# Altium PCB M1-Test-Board.PcbDoc (part 5 of 5)
Units mil, origin at the board's own origin, x right, y up, seen from the top; angles counter-clockwise.
Board outline 3977 x 5000 mil, 4 copper layers (Top, GND Layer 2, Power Layer 3, Bottom), stack 60 mil thick; 191 components, 124 nets, 579 pads, 189 vias.
Unrouted connection lines stored in the file: 80.
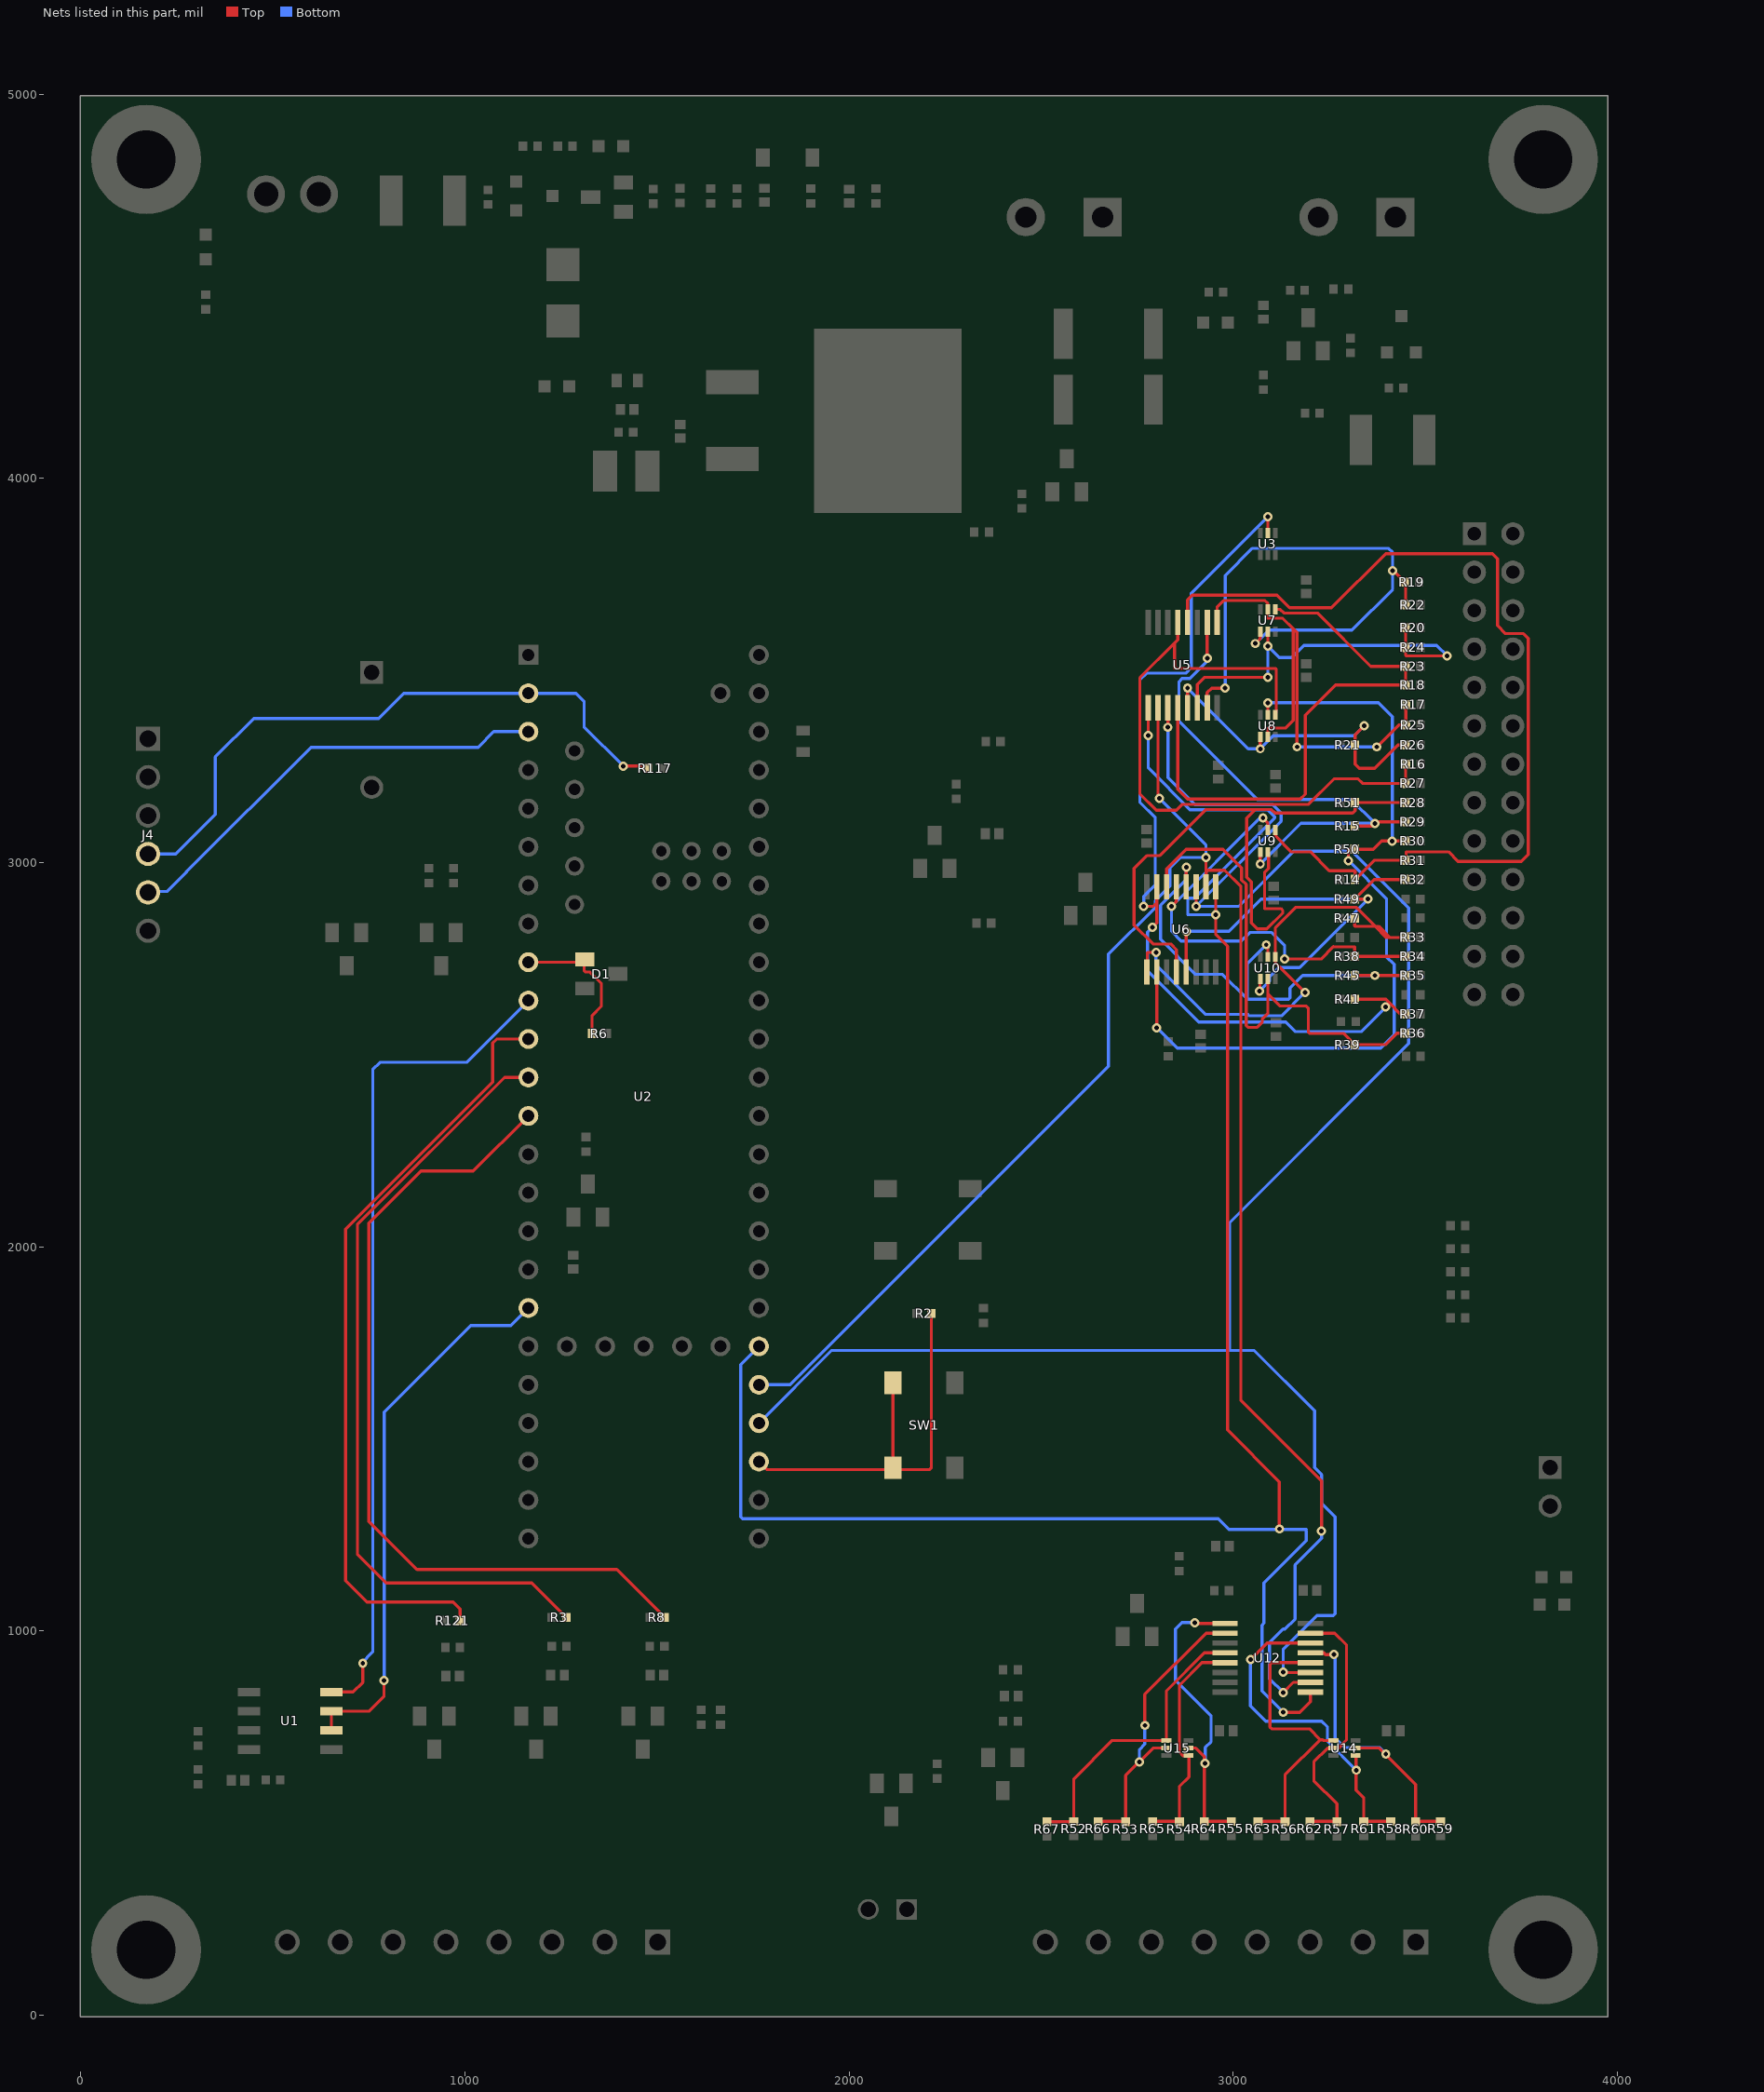
[diagram p5: the nets of this part, all layers, seen from the top]

## Via types
v1: diameter 24, hole 12, Top to Bottom, 186 vias
v2: diameter 50, hole 28, Top to Bottom, 3 vias

## Nets (pads, with @x,y where several pads share a name; then routed paths per layer and width w, separated by ;. In a path a pad name is that pad's centre, name@x,y a point inside that pad or via, vN(x,y) a via of type N, cw(c..) or ccw(c..) an arc to the next point about the centre after c; other vN are vias at no path point) (continued)
NetU2_36: U2.36 U5.11 U6.11 U12.11 | length 5366.6
  Top w8: v1(2830,3352) U5.11@2830,3403 ; v1(2903.39,2886) U6.11@2903.39,2937 ; v1(3130.38,892.95) 3131.72,891.61 U12.11@3201,891.61
  Bottom w8: U2.36@1765.2,1540.63 1954.57,1730 2985.31,1730 ; v1(2830,3352) 2830,3220.93 2900,3150.93 3102.76,3150.93 3125,3128.69 3125,3107.61 v1(2903.39,2886) 3014,2886 3157.64,3029.64 3309.36,3029.64 3457,2882 3457,2529 2990,2062 2990,1734.69 2985.31,1730 ; v1(3130.38,892.95) 3130.38,952.66 3217.72,1040 3260.31,1040 3265,1044.69 3265,1297.16 3230,1332.16 3230,1406.7 3211.7,1425 3211.7,1573.3 3055,1730 2985.31,1730
NetU2_37: U2.37 U5.10 U6.10 U12.10 | length 4949.5
  Top w8: U5.10@2804.41,3403 2804.41,3170.59 v1(2808,3167) ; v1(2928.98,3013) U6.10@2928.98,2937 2929.98,2980 2977.5,2980 3020,2937.5 3020,1600 3230,1390 v1(3230,1260) ; v1(3130.38,839.64) 3156.76,866.02 U12.10@3201,866.02
  Bottom w8: U2.37@1765.2,1640.63 1846.11,1640.63 2675,2469.52 2675,2761.5 2797,2883.5 2797,2900.74 2835,2938.74 2835,2986.07 2861.93,3013 v1(2928.98,3013) 2928.98,3046.02 v1(2808,3167) ; v1(3130.38,839.64) 3094.68,875.33 3094.68,969.68 3130,1005 3135,1005 3160.79,1030.79 3160.79,1171.49 3230,1240.7 v1(3230,1260)
NetU2_38: U2.38 U5.9 U6.9 U12.9 | length 5308.4
  Top w8: v1(2778.82,3331) U5.9@2778.82,3403 ; U6.9@2954.57,2937 v1(2954.57,2864) 2954.57,2812.5 2985.07,2782 2985.07,1522.93 3120,1388 v1@3120,1265 ; v1(3130.38,787.95) 3172.95,787.95 3201,816 U12.9@3201,840.43
  Bottom w8: U2.38@1765.2,1740.63 1717.86,1693.3 1717.86,1296.34 1722.55,1291.66 2961.34,1291.66 2989.08,1263.92 3120.87,1263.92 3190,1263.92 ; v1(2778.82,3331) 2778.82,3246.11 2887.5,3137.43 3089.57,3137.43 3108,3119 3108,3116 2899.5,2907.5 2883,2907.5 2881.89,2906.39 2881.89,2865 2882.89,2864 v1(2954.57,2864) ; v1(3130.38,787.95) 3075,843.33 3075,1015 3080,1020 3080,1080 3080,1125 3190,1235 3190,1260
  other v1: 3120.87,1265.28
P6V-1: R20.2 R24.2 U5.14 U7.5 | length 1054.8
  Top w8: U5.14@2906.77,3403 2906.77,3463.77 2925,3482 v1(3090,3482) ; v1(3090,3563.5) U7.5@3090,3601.06 ; R20.2@3448.91,3611 R24.2@3448.91,3559.79 3448.91,3539 3449.91,3538 v1(3557,3538)
  Bottom w8: v1(3090,3482) v1(3090,3563.5) 3120,3533.5 3152.5,3533.5 3184,3565 3530,3565 v1(3557,3538)
P6V-2: R19.2 R22.1 U5.15 U7.4 | length 1501.3
  Top w8: U5.15@2932.36,3403 2932.36,3442.36 2944,3454 v1(2979,3454) ; v1(3057.81,3570.07) 3070.31,3582.57 U7.4@3070.31,3601.06 ; v1(3415,3760) 3416.69,3760 3445.91,3730.79 R19.2@3445.91,3730 ; R22.1@3448.91,3671 R19.2@3448.91,3727
  Bottom w8: v1(2979,3454) 2979,3747 3050,3818 3404,3818 3415,3807 3415,3711 3309.07,3605.07 3092.81,3605.07 v1(3057.81,3570.07)
P6V-3: R18.2 R23.1 U5.12 U7.1 | length 1509.3
  Top w8: U5.12@2855.59,3403 2855.59,3190.41 2881,3165 3175,3165 3188,3178 3188,3383.5 3266.52,3462.02 R18.2@3448.91,3462.02 R23.1@3448.91,3511 3358,3511 3219.5,3649.5 3131.44,3649.5 3122,3658.94 U7.1@3109.69,3658.94
P12V-1: R17.2 R25.1 U5.1 U7.2 U8.5 | length 1305.6
  Top w8: U5.1@2957.95,3625 2957.95,3664.95 2975,3682 3082.93,3682 3090,3674.93 U7.2@3090,3658.94 3090,3637 3091,3636 3129,3636 3156.18,3608.82 ; U8.5@3090,3327.06 3090,3349 3091,3350 3136,3350 3156.18,3370.18 3156.18,3608.82 ; v1(3166,3301) 3166,3599 3156.18,3608.82 ; v1(3374,3301) 3430.95,3357.95 R25.1@3449.81,3357.95 R17.2@3449.81,3411
  Bottom w8: v1(3166,3301) v1(3374,3301)
P12V-2: R21.2 R26.2 U5.13 U8.4 | length 903.3
  Top w8: U5.13@2881.18,3403 v1(2881.18,3454) ; v1(3070.31,3296.07) U8.4@3070.31,3327.06 ; v1(3341,3356) 3317.09,3332.09 R21.2@3317.09,3306 3317.09,3256.5 3328.59,3245 3368,3245 3429,3306 R26.2@3448.91,3306
  Bottom w8: v1(2881.18,3454) 3039.11,3296.07 v1(3070.31,3296.07) 3104.43,3330.19 3315.19,3330.19 v1(3341,3356)
R_G1: R34.1 R38.1 U6.13 U9.2 | length 1205.9
  Top w8: v1(2839.5,2886) 2852.2,2898.7 U6.13@2852.2,2937 ; v1(3077.5,3115.93) 3090,3103.43 U9.2@3090,3084.94 ; v1(3134,2749) 3229,2749 3261,2781 3316.19,2780 R38.1@3316.19,2756 R34.1@3448.91,2756
  Bottom w8: v1(3077.5,3115.93) 3069.43,3115.93 v1(2839.5,2886) 2839.5,2821 2864.5,2796 3021,2796 3043,2818 3100,2818 3134,2784 v1(3134,2749)
R_G2: R36.1 R39.1 U6.14 U10.5 | length 1329
  Top w8: U6.14@2826.61,2937 2826.61,2984 2877.11,3034.5 2973.5,3034.5 3021.81,2986.19 3021.81,2954.78 3033.5,2943.09 3033.5,2575.73 3038.19,2571.05 3062.5,2571.05 3075.55,2584.1 3075.55,2592.55 3090,2607 3090,2658.5 ; U10.5@3090,2696.85 3090,2658.5 ; R36.1@3448.91,2556 3426,2556 3396,2526 R39.1@3317.09,2526 3288.09,2555 3200.09,2555 3195.41,2559.69 3195.41,2621.59 3190.53,2626.47 3122.03,2626.47 3090,2658.5
R_G3: R32.2 R49.2 U6.5 U10.4 | length 1222.2
  Top w8: U6.5@2877.79,2715 v1(2877.79,2821) ; v1(3068.5,2665.86) 3069.41,2666.77 3069.41,2695.95 U10.4@3070.31,2696.85 ; v1(3351,2904.98) R49.2@3316.19,2904.98 3367.21,2956 R32.2@3448.91,2956
  Bottom w8: v1(2877.79,2821) 2989,2821 3072.98,2904.98 v1(3351,2904.98) 3172.75,2726.73 3118.69,2726.73 3095.12,2703.17 3095.12,2692.48 v1(3068.5,2665.86)
R_G4: R33.2 R47.2 U6.1 U10.1 | length 1294.3
  Top w8: U6.1@2775.43,2715 2776.43,2766 v1(2799,2766) ; v1(3187,2662) 3109.68,2739.32 U10.1@3109.69,2754.73 3109.68,2830.3 3163.05,2883.67 3301.23,2883.67 3319.9,2883.67 3369.57,2834 ; R47.2@3316.19,2855 3316.19,2835 3317.19,2834 3369.57,2834 ; R33.2@3448.91,2806 3448.91,2804.69 3408,2804.69 ; 3369.57,2834 3398.88,2804.69 3408,2804.69 ; 3369.57,2834 3378.69,2834 3408,2804.69
  Bottom w8: v1(2799,2766) 2799,2733.5 2927.5,2605 3037.59,2605 3041.59,2601 3126,2601 v1(3187,2662)
R_G5: R35.2 R45.2 U6.12 U10.2 | length 1256.1
  Top w8: U6.12@2877.79,2937 v1(2877.79,2988) ; v1(3086,2786) 3090,2782 U10.2@3090,2754.73 ; R45.2@3317.09,2706 v1(3369,2706) R35.2@3448.91,2706
  Bottom w8: v1(2877.79,2988) 2877.79,2955.29 2811,2888.5 2811,2800 2902,2709 2972,2709 3036,2645 ; v1(3086,2786) 3036,2736 3036,2645 ; v1(3369,2706) 3180.99,2706 3147.84,2672.85 3147.84,2647.84 3144,2644 3037,2644 3036,2645
R_G6: R37.2 R41.2 U3.2 U6.15 | length 2422.9
  Top w8: v1(2767,2886) 2792.02,2886 2801.02,2895 ; v1(2789.5,2831) 2801.02,2842.52 2801.02,2895 ; U6.15@2801.02,2937 2801.02,2895 ; U3.2@3090,3857.87 v1(3090,3900) ; R41.2@3317.09,2644.19 3397.22,2644.19 3407.2,2634.2 ; v1(3397,2624) 3407.2,2634.2 ; R37.2@3448.91,2606 3435.41,2606 3407.2,2634.2
  Bottom w8: v1(2767,2886) 2767,2912 2797,2942 2797,3117 2757,3157 2757,3475 2775,3493 2876,3493 2891,3508 2891,3701 v1(3090,3900) ; v1(2789.5,2831) 2777,2818.5 2777,2718 2910,2585 3137,2585 3162,2560 3333,2560 v1(3397,2624)
R_nRst: R15.2 R29.1 U5.2 U9.4 | length 1429.5
  Top w8: v1(2932.36,3532) U5.2@2932.36,3625 ; v1(3070.31,2996.07) U9.4@3070.31,3027.06 ; R15.2@3317.09,3095 3362,3095 v1(3369,3102) 3373,3106 R29.1@3448.91,3106
  Bottom w8: v1(2932.36,3532) 2932.36,3523.86 2887.5,3479 2867,3479 2859,3471 2859,3368 3062.57,3164.43 3306.57,3164.43 v1(3369,3102) 3176.24,3102 v1(3070.31,2996.07)
R_S0: R30.2 R50.2 U6.2 U8.2 | length 2182.6
  Top w8: v1(2801,2570) U6.2@2801.02,2715 ; U8.2@3090,3384.94 v1(3090,3416) ; v1(3300,3005) 3300,3033.79 3301,3034.79 R50.2@3316.19,3034.79 3364.79,3034.79 3386,3056 v1(3414,3056) R30.2@3448.91,3056
  Bottom w8: v1(2801,2570) 2854,2517 3384,2517 3419,2552 3419,2735 3399,2755 3399,2906 v1(3300,3005) ; v1(3090,3416) 3378,3416 3414,3380 v1(3414,3056)
R_S1: R16.2 R27.1 U5.5 U8.1 | length 1736.7
  Top w8: U5.5@2855.59,3625 2855.59,3579.59 2847,3571 ; U8.1@3109.69,3384.94 3109.68,3388 3112,3390.32 3112,3504 3111,3505 2848,3505 2847,3506 2847,3571 ; R16.2@3449.81,3256 3448.91,3255.09 R27.1@3448.91,3206 3337,3206 3325,3218 3263,3218 3196.5,3151.5 2867.5,3151.5 2852,3136 2800,3136 2757,3179 2757,3481 2847,3571
R_S2: R28.2 R51.2 U6.4 U9.5 | length 1764.5
  Top w8: U6.4@2852.2,2715 2852.2,2773.3 2837.5,2788 2791.04,2788 2742.02,2837.02 2742.02,2985.02 2775,3018 2808,3018 2928,3138 3057.36,3138 ; U9.5@3090,3027.06 3090,3020 3092,3020 3092,2984.5 3081.5,2974 3081.5,2881 3082.5,2880 3124.29,2880 3128.98,2875.31 3128.98,2868.69 3087.29,2827 3062.5,2827 3047,2842.5 3047,2950.03 3035.31,2961.71 3035.31,3115.95 3057.36,3138 ; R28.2@3448.91,3156 R51.2@3317.09,3156 3317.09,3135 3310.95,3128.85 3108.85,3128.85 3099.71,3138 3057.36,3138
R_S7: R14.2 R31.1 U5.4 U9.1 | length 2571.9
  Top w8: U5.4@2881.18,3625 2881.18,3683.5 2893.68,3696 3114,3696 3147,3663 3256,3663 3397,3804 3675,3804 3688,3791 3688,3617 3709,3596 3755.5,3596 3768,3583.5 3768,3021 3750,3003 3585.5,3003 3560.5,3028 3449.91,3028 R31.1@3448.91,3005.88 3366.98,3005.88 R14.2@3317.09,2956 3317.09,2978 3316.09,2979 3250,2979 3201,3028 3150.68,3028 3109.68,3069 U9.1@3109.69,3084.94
RX1: J4.4 R117.1 U2.0 | length 1682.3
  Top w8: v1(1412,3251) 1456.88,3251 1462.88,3245 R117.1@1475.91,3245
  Bottom w8: J4.4@175,3022.42 247.42,3022.42 350,3125 350,3275 450,3375 775,3375 840.63,3440.63 U2.0@1165.2,3440.63 1289.37,3440.63 1310,3420 1310,3353 v1(1412,3251)
RX2: D1.1 R6.1 U2.7 | length 362.2
  Top w8: U2.7@1165.2,2740.63 1304.63,2740.63 1310,2735.26 1310,2719.69 1314.69,2715 1325,2715 1330,2710 1330.44,2710 1355,2685.44 1355,2625.87 1330.91,2601.78 R6.1@1330.91,2555
Sol1: R121.1 U2.9 | length 2013.9
  Top w8: R121.1@987.09,1027 987.09,1057 969.09,1075 745,1075 689.09,1130.91 689.09,2045.87 1072,2428.77 1072,2530 1082.63,2540.63 U2.9@1165.2,2540.63
Sol2: R3.1 U2.10 | length 2073.9
  Top w8: U2.10@1165.2,2440.63 1102.95,2440.63 720,2057.68 720,1200 795,1125 1174.09,1125 R3.1@1264.09,1035
Sol3: R8.1 U2.11 | length 2181.1
  Top w8: U2.11@1165.2,2340.63 1021.57,2197 885.31,2197 750,2061.69 750,1285 875,1160 1395.09,1160 R8.1@1520.09,1035
TargetPower: R2.1 SW1.3 SW1.4 U2.35 | length 1085.9
  Top w8: U2.35@1765.2,1440.63 1785.83,1420 2109.79,1420 SW1.3@2114.29,1424.5 ; SW1.4@2114.29,1645.5 SW1.3@2114.29,1424.5 ; R2.1@2214.09,1826.16 2214.09,1724.94 2214.29,1724.74 2214.29,1424.69 2209.61,1420 2118.79,1420 SW1.3@2114.29,1424.5
TX1: J4.5 U2.1 | length 1164
  Bottom w8: J4.5@175,2922.42 177.58,2925 225,2925 275,2975 275,2976 599,3300 1034.37,3300 1075,3340.63 U2.1@1165.2,3340.63
TX2: U1.4 U2.8 | length 2180.4
  Top w8: U1.4@652.25,841 709,841 734,866 v1(734,916)
  Bottom w8: v1@730,915 760,945 760,2461.52 778.48,2480 1004.57,2480 U2.8@1165.2,2640.63
Uart2Dir: U1.2 U1.3 U2.26 | length 1431.9
  Top w8: U1.2@652.25,741 U1.3@652.25,791 751,791 789,829 v1(789,871)
  Bottom w8: v1@789.83,870 789.83,1569.83 1015,1795 1119.57,1795 U2.26@1165.2,1840.63
V12_1: R59.2 R60.1 U12.13 U14.5 | length 789.1
  Top w8: U12.13@3201,942.8 3236,942.8 3240.3,938.5 v1(3262.48,938.5) ; U14.5@3318.94,695 3380,695 3475,600 R60.1@3475,503.19 3475.9,504.09 R59.2@3540,504.09
  Bottom w8: v1@3265,940 3265,721.54 3290,696.54 3380.44,696.54 v1(3397.42,679.56)
V12_2: R58.2 R61.1 U12.14 U14.4 | length 910.5
  Top w8: v1(3045,925) 3088.39,968.39 U12.14@3201,968.39 ; U14.4@3318.94,675.32 3320,674.25 3320,585 3340,565 R61.1@3340,504.09 R58.2@3410,504.09
  Bottom w8: v1(3045,925) 3045,805 3085,765 3230.31,765 3245.31,750 3245.31,712.5 v1(3320.25,637.56)
V33_1: R57.2 R62.1 U12.15 U14.2 | length 714.9
  Top w8: R62.1@3200,504.09 3269.1,504.09 R57.2@3270,503.19 3270,550 3210,610 3210,658.93 3246.07,695 U14.2@3261.06,695 3276.06,695 3276.06,697.15 3295,716.09 3295,963.39 3264.42,993.98 U12.15@3201,993.98
V33_2: R56.2 R63.1 U12.12 U14.1 | length 772.3
  Top w8: R63.1@3065,504.09 3134.1,504.09 R56.2@3135,503.19 3135,625 3226.69,716.69 ; U12.12@3201,917.21 3100.12,917.21 3095.44,912.52 3095.44,749.69 3100.12,745 3198.37,745 3226.69,716.69 ; U14.1@3261.06,714.68 3235.32,714.69 3233.31,716.69 3226.69,716.69
V33_3: R55.2 R64.1 U12.1 U15.5 | length 822.8
  Top w8: U15.5@2883.94,695 2902.42,695 2925,672.42 R64.1@2925,504.09 R55.2@2995,504.09 ; v1@2896.93,1019.57 U12.1@2979,1019.57
  Bottom w8: v1(2900.38,1021.57) 2866.57,1021.57 2850,1005 2850,870.94 2942.44,778.5 2942.44,712.05 2926.93,696.54 v1(2926.93,655)
V33_4: R54.2 R65.1 U12.5 U15.4 | length 598.6
  Top w8: R65.1@2790,504.09 2859.1,504.09 R54.2@2860,503.19 2860,595 2885,620 2885,674.25 U15.4@2883.94,675.32 2868.94,675.32 2860,684.26 2860,858.61 2918.59,917.21 U12.5@2979,917.21
V33_5: R53.2 R66.1 U12.2 U15.2 | length 784.6
  Top w8: R66.1@2648.82,504.09 2719.1,504.09 R53.2@2720,503.19 2720,623.9 2791.1,695 U15.2@2826.06,695 ; v1(2770,754) 2770,834.62 2929.36,993.98 U12.2@2979,993.98
  Bottom w8: v1(2755.87,658.69) 2755.87,690.87 2770,705 v1(2770,754)
V33_6: R52.2 R67.1 U12.4 U15.1 | length 786.7
  Top w8: R67.1@2515,503.19 2584.1,503.19 R52.2@2585,504.09 2585,615 2684.69,714.69 U15.1@2826.06,714.68 2826.06,843.77 2925.09,942.8 U12.4@2979,942.8
pads on no net: D1.2 D4.1 J4.2 J4.3 J4.6 J5.1 J5.2 J5.4 J5.21 U2.2 U2.3 U2.3.3V_1 U2.3.3V_3 U2.5 U2.5V U2.6 U2.12 U2.13 U2.24 U2.27 U2.28 U2.29 U2.30 U2.31 U2.32 U2.D+ U2.D- U2.GND5 U2.LED U2.ON/OFF U2.PROGRAM U2.R+ U2.R- U2.T+ U2.T- U2.USB_GND1 U2.USB_GND2 U2.VBAT U2.VUSB U3.1

## Polygon pours and split planes (outlines as drawn)
GND on Bottom "GND_L04_P001" (solid, remove dead copper, pour order 1): -10,5005 3980,5005 3980,-20 20,-20 -5,5
GND on Top "GND_L01_P000" (solid, remove dead copper, pour order 0): -4.25,4992.22 0.82,4997.29 3967.75,4997.29 3967.75,-0.15 3969.32,-1.72 0.3,-1.72 -2.25,0.83 -2.25,482.29
+3.3V on Power Layer 3 (split plane): 186 vertices, not listed, extent 8.09,6.09 3964.91,4985.91
+5V on Power Layer 3 (split plane): 366.93,4575 367.21,4572.91 368.01,4570.97 369.29,4569.29 374.29,4564.29 375.97,4563.01 377.91,4562.21 380,4561.93 616.93,4561.93 616.93,4360 616.93,4165.2 616.93,3970 617.21,3967.91 618.01,3965.97 619.29,3964.29 914.29,3669.29 915.97,3668.01 917.91,3667.21 920,3666.93 1365,3666.93 1367.09,3667.21 1369.03,3668.01 1370.71,3669.29 1430.71,3729.29 1431.99,3730.97 1432.79,3732.91 1433.07,3735 1433.07,4171.62 1796.97,4171.62 1876.93,4091.66 1876.93,4060 1876.93,4050 1876.93,3408.07 1525,3408.07 1523.15,3407.83 1522.91,3407.79 1520.97,3406.99 1519.29,3405.71 1509.29,3395.71 1508.01,3394.03 1507.21,3392.09 1506.93,3390 1506.93,3176.34 1507.21,3174.25 1508.01,3172.3 1509.29,3170.63 1509.96,3169.96 1511.63,3168.68 1513.58,3167.87 1515.67,3167.6 1517.76,3167.87 1517.89,3167.93 1871.93,3167.93 1871.93,2765 1872.21,2762.91 1873.01,2760.97 1874.29,2759.29 1929.29,2704.29 1930.97,2703.01 1932.91,2702.21 1933.15,2702.17 1935,2701.93 2640,2701.93 2642.09,2702.21 2644.03,2703.01 2645.71,2704.29 2736.96,2795.54 2738.24,2797.22 2739.04,2799.16 2739.32,2801.25 2739.04,2803.34 2738.24,2805.28 2738.07,2805.5 2738.07,2830 2738.07,2925 2738.07,3966.93 3576.93,3966.93 3576.93,2115 3576.93,2114.99 3576.93,2114.97 3582.06,623.07 2858.07,623.07 2858.07,1275 2857.79,1277.09 2856.99,1279.03 2855.71,1280.71 2854.03,1281.99 2852.09,1282.79 2850,1283.07 2193.07,1283.07 2193.07,1931.66 2373.34,2111.93 2495,2111.93 2497.09,2112.21 2497.5,2112.38 2497.91,2112.21 2500,2111.93 2675,2111.93 2677.09,2112.21 2679.03,2113.01 2680.71,2114.29 2695.71,2129.29 2696.99,2130.97 2697.79,2132.91 2698.07,2135 2697.79,2137.09 2697.62,2137.5 2697.79,2137.91 2698.07,2140 2698.07,2305 2697.79,2307.09 2696.99,2309.03 2696.25,2310 2696.99,2310.97 2697.79,2312.91 2698.07,2315 2697.79,2317.09 2696.99,2319.03 2695.71,2320.71 2685.71,2330.71 2684.03,2331.99 2682.09,2332.79 2680,2333.07 1010,2333.07 1007.91,2332.79 1005.97,2331.99 1004.29,2330.71 1003.01,2329.03 1002.21,2327.09 1001.93,2325 1001.93,578.34 946.66,523.07 10,523.07 8.09,522.82 8.09,4985.91 366.93,4985.91
+12V on Power Layer 3 (split plane): 3144.29,4984.29 3381.93,4746.66 3381.93,4308.07 2666,4308.07 2665.5,4308 2665,4308.07 2393.07,4308.07 2393.07,4745 2392.79,4747.09 2391.99,4749.03 2390.71,4750.71 2389.03,4751.99 2387.09,4752.79 2385,4753.07 2120,4753.07 2117.91,4752.79 2115.97,4751.99 2114.29,4750.71 2070.05,4706.46 2068.77,4704.79 2067.96,4702.84 2067.69,4700.75 2067.69,4453.07 1298.34,4453.07 1175.71,4575.71 1174.03,4576.99 1172.09,4577.79 1170,4578.07 383.34,4578.07 383.07,4578.34 383.07,4985.91 3143.05,4985.91
GND on GND Layer 2 (split plane): 3964.91,6.09 8.09,6.09 8.09,4985.91 3964.91,4985.91

## Keep-outs
Keep-Out Layer:
  lines w34: 3973.34,-4 -1.07,-4 -1.07,4996.07 2.86,5000 3975,5000 3975.5,-3.29

## Other copper
Power Layer 3 (plane layer: these items are gaps in the copper):
  lines w16: 10,515 950,515 1010,575 1010,2325 2680,2325 2690,2315 ; 375,4995 375,4575 380,4570 1170,4570 1295,4445 2075.75,4445 2075.75,4700.75 2120,4745 2385,4745 2385,4300 2665,4300 ; 625,4570 625,4360 625,4165.2 625,3970 920,3675 1365,3675 1425,3735 1425,4179.69 1800.31,4179.69 1885,4095 1885,4050 ; 1515.67,3175.67 1515,3176.34 1515,3390 1525,3400 1880,3400 ; 1517.88,3176 1880,3176 1880,2765 1935,2710 2090,2710 2345,2710 2640,2710 2731.25,2801.25 2730,2802.5 2730,2830 2730,2925 2730,3975 3585,3975 3585,2115 3590.16,615 2850,615 ; 1885,3400 1885,4060 ; 2185,1280 2185,1275 ; 2495,2120 2370,2120 2185,1935 2185,1275 ; 2500,2120 2675,2120 2690,2135 ; 2666,4300 3390,4300 3390,4750 3150,4990 ; 2690,2140 2690,2305 ; 2850,620 2850,1275 2185,1275

## Silkscreen, mask and mechanical layers (free items; w line width, h text height)
Silkscreen Top:
  lines w4: 2470,1290 2485,1275 3472.21,1275 3495,1297.79 3495,1542.3 3457.3,1580 2510,1580 2470,1540 2470,1505 2470,1290
  lines w8: 538,250 538,460 ; 675,250 675,460 ; 811.34,257.48 811.34,459.92 ; 945,257.48 945,465 ; 1088.83,257.48 1088.83,461.08 ; 1223.39,465.44 1225,257.48 ; 1363.83,260 1363.83,461.08 ; 1505,260 1505,460 ; 2513.83,1310 2513.83,1381.08 ; 2643.83,1310 2643.83,1381.08 ; 2787.18,1310 2787.18,1381.08 ; 2923.83,1310 2923.83,1381.08 ; 3063.83,1306.21 3063.83,1377.29 ; 3203.83,1305 3203.83,1376.08 ; 3338.83,1306.21 3338.83,1377.29 ; 3463.83,1305 3463.83,1376.08
  text "Batt Sim On" at 1280,4935.44 h60
  text "-" at 615,4636.09 h80
  text "+" at 470,4631.52 h80
  text "Power" at 1978,4560.89 h120
  text "Batt" at 3690,4555.89 h120
  text "-" at 2450,4529.11 h120
  text "-" at 3212,4529.11 h120
  text "+" at 2640,4524.78 h120
  text "+" at 3405,4524.78 h120
  text "Power-In" at 375,4520.89 h120
  text "12V/2A" at 405,4428.44 h120
  text "Cntr On" at 2869.27,4300.44 h60
  text "+5 Volt" at 1025,4220.76 h60
  text "Debug" at 337.45,2957.79 h120 r90
  text "Boot Target" at 1980,2376.39 h120
  text "LenelS2, Carrier Corp" at 125,2347.44 h120
  text "M1-3200 Test Fixture" at 125,2215.89 h120
  text "1" at 3892,2144 h60 r90
  text "Rev  C" at 125,2075.89 h120
  text "Panel LED" at 3854.11,1530 h120 r90
  text "1" at 3840,1490 h60 r90
  text "P3.2" at 2529.65,1400 h60 r90
  text "TP33" at 2664.65,1400 h60 r90
  text "TP35" at 2804.65,1400 h60 r90
  text "TP34" at 2939.65,1400 h60 r90
  text "TP31" at 3079.65,1400 h60 r90
  text "TP36" at 3209.65,1400 h60 r90
  text "TP25" at 3354.65,1400 h60 r90
  text "BatCell" at 3474.56,1400 h60 r90
  text "Target Power" at 1920,1312.55 h120
  text "RS-485" at 540,535.44 h60
  text "GND" at 1052.5,476.6 h60
  text "GND" at 1327.5,476.6 h60
  text "A" at 525,475.17 h60
  text "B" at 665,475 h60
  text "GND" at 775,475.44 h60
  text "Sol 1" at 959.56,475 h60 r90
  text "Sol 2" at 1236.49,475 h60 r90
  text "Sol 3" at 1519.65,475 h60 r90
  text "8" at 2390,305.44 h60
  text "Tamper" at 1665,147.44 h120
  text "1" at 3584,88 h60
  text "1" at 1645,65 h60
  text "8" at 375,60.44 h60
  text "2" at 1530,38 h60
Board Outline:
  lines w10: 0.3,-1.88 3975.5,-1.88 -3.12,-1.88 3.45,4.69 3.45,4988.04 15.41,5000 3975,5000 ; 3975.5,-3.29 3975.5,5000
Drill Drawing:
  drawing of 394 lines, arcs and shapes, not listed
  text "Notes:" at 9959,5722.86 h120
  text "Layer" at 4636.16,5583.58 h117.16
  text "Name" at 5126.52,5583.58 h117.16
  text "Material" at 6377.62,5583.58 h117.16
  text "Thickness" at 7229.81,5583.58 h117.16
  text "Constant" at 7929.81,5583.58 h117.16
  text "Board Layer Stack" at 8577.67,5583.58 h117.16
  text "1.  LATEST VERSION OF ALL REFERENCED SPECIFICATIONS TO BE USED UNLESS" at 10062.5,5492.86 h120
  text "Silkscreen Top" at 5126.52,5349.26 h117.16
  text "OTHERWISE SPECIFIED." at 10262.5,5292.86 h120
  text "Solder Mask Top" at 5126.52,5114.95 h117.16
  text "Solder Resist" at 6377.62,5114.95 h117.16
  text "1.00mil" at 7229.81,5114.95 h117.16
  text "3.2" at 7929.81,5114.95 h117.16
  text "2.  FABRICATE IN ACCORDANCE WITH IPC-6012B, CLASS 2  UNLESS" at 10062.5,5092.86 h120
  text "OTHERWISE SPECIFIED." at 10262.5,4892.86 h120
  text "Top Surface Plating" at 5126.52,4880.64 h117.16
  text "Lead-Free" at 6377.62,4880.64 h117.16
  text "1.40mil" at 7229.81,4880.64 h117.16
  text "3.  INSPECT IN ACCORDANCE WITH IPC-6012B, CLASS 2 UNLESS OTHERWISE" at 10061,4683.86 h120
  text "1" at 4636.16,4646.33 h117.16
  text "Top" at 5126.52,4646.33 h117.16
  text "0.70mil" at 7229.81,4646.33 h117.16
  text "SPECIFIED." at 10331,4533.86 h120
  text "Dielectric 1" at 5126.52,4412.02 h117.16
  text "2 x 2116" at 6377.51,4412.02 h117.16
  text "9.10mil" at 7229.81,4412.02 h117.16
  text "4.3" at 7929.81,4412.02 h117.16
  text "4.  MATERIAL:" at 10061,4288.86 h120
  text "2" at 4636.05,4177.71 h117.16
  text "GND Layer 2" at 5126.52,4177.71 h117.16
  text "0.70mil" at 7229.81,4177.71 h117.16
  text "HIGH TEMP FR4 (OR EQUIVALENT FOR ROHS COMPLIANCE)." at 10353.75,4085.61 h120
  text "Dielectric2" at 5126.52,3943.4 h117.16
  text "Core" at 6377.62,3943.4 h117.16
  text "39.00mil" at 7229.81,3943.4 h117.16
  text "4.6" at 7929.81,3943.4 h117.16
  text "FLAME RETARDENT, IN ACCORDANCE WITH UL STANDARD 796." at 10353.75,3920.61 h120
  text "FINISHED BOARD MUST MEET UL94V-0." at 10353.75,3745.61 h120
  text "3" at 4636.16,3709.08 h117.16
  text "Power Layer 3" at 5126.52,3709.08 h117.16
  text "0.70mil" at 7229.81,3709.08 h117.16
  text "5.  SILKSCREEN NOMENCLATURE NOT TO COVER ANY PORTION OF A COMPONENT" at 10065.15,3542.11 h120
  text "Dielectric3" at 5126.52,3474.77 h117.16
  text "2 x 2116" at 6377.51,3474.77 h117.16
  text "9.10mil" at 7229.81,3474.77 h117.16
  text "4.3" at 7929.81,3474.77 h117.16
  text "PAD. FABRICATOR TO CLIP ANY NON-CONFORMING SILKSCREEN NOMENCLATURE." at 10265.15,3342.11 h120
  text "4" at 4636.16,3240.46 h117.16
  text "Bottom" at 5126.52,3240.46 h117.16
  text "0.70mil" at 7229.81,3240.46 h117.16
  text "DO NOT REMOVE SILKSCREEN FROM TENTED VIAS. SILKSCREEN COLOR: WHITE." at 10265.15,3142.11 h120
  text "Bottom Surface Finish" at 5126.52,3006.15 h117.16
  text "Lead-Free" at 6377.62,3006.15 h117.16
  text "1.40mil" at 7229.81,3006.15 h117.16
  text "6.  USE LPI SOLDER MASK OVER BARE COPPER PER IPC-SM-840C, CLASS 2." at 10051.15,2891.11 h120
  text "Solder Mask Bottom" at 5126.52,2771.84 h117.16
  text "Solder Resist" at 6377.62,2771.84 h117.16
  text "1.00mil" at 7229.81,2771.84 h117.16
  text "3.2" at 7929.81,2771.84 h117.16
  text "SOLDERMASK COLOR: BLUE." at 10336,2691.86 h120
  text "Silkscreen Bottom" at 5126.52,2537.53 h117.16
  text "7.  GLOBAL AND LOCAL FIDUCIALS MUST BE FREE OF ANY MARKINGS." at 10061,2441.86 h120
  text "8. REMOVAL OF NON-FUNCTIONAL PADS ON INNER LAYERS ALLOWED." at 10061,2146.86 h120
  text "9. THEIVING OF OUTER LAYERS IS ACCEPTABLE AS LONG AS THE COPPER IS" at 10061,1846.86 h120
  text "KEPT A MININMUM OF 0.200\" FROM ANY DESIGN FEATURE." at 10361,1646.86 h120
  text "10. PRIOR TO BOARD FABRICATION, COMPARE GERBER DATA TO SUPPLIED" at 10061,1446.86 h120
  text "IPC-D-356A NETLIST. REPORT ALL DISCREPANCIES." at 10361,1246.86 h120
  text "11. ENTIRE BOARD TO BE IMMERSION GOLD PLATED. 2 TO 5 MICROINCHES" at 10061,946.86 h120
  text "OVER 100 MICROINCHES MINIMUM OF ELECTROLESS NICKEL." at 10186,746.86 h120
  text "12. BOARD TO BE ROHS COMPATIBLE." at 10074.08,461.31 h120
  text "13. ANY CHANGES TO THE SUPPLIED GERBER DATA TO BE APPROVED BY S2 SECURITY." at 10070,235 h120
  text "Rev A - Initial" at 7440,-930 h120
  text "Rev B - Added BJT Q11 & Q12 to control boot target" at 7440,-1055 h120
  text "Symbol" at -64.04,-1618.13 h95.99
  text "Count" at 311.82,-1618.13 h95.99
  text "Hole Size" at 701.62,-1618.13 h95.99
  text "Plated" at 1467.04,-1618.13 h95.99
  text "Hole Type" at 1797,-1618.13 h95.99
  text "Drill Layer Pair" at 2277.38,-1618.13 h95.99
  text "Via/Pad" at 2934.48,-1618.13 h95.99
  text "Pad Shape" at 3328.11,-1618.13 h95.99
  text "Template" at 3842.33,-1618.13 h95.99
  text "Description" at 4405.36,-1618.13 h95.99
  text "Hole Tolerance (+)" at 4921.8,-1618.13 h95.99
  text "Hole Tolerance (-)" at 5724.88,-1618.13 h95.99
  text "2" at 311.82,-1783.71 h79.99
  text "40.16mil (1.020mm)" at 701.62,-1783.71 h79.99
  text "PTH" at 1467.04,-1783.71 h79.99
  text "Round" at 1797,-1783.71 h79.99
  text "Top - Bottom" at 2277.38,-1783.71 h79.99
  text "Pad" at 2934.48,-1783.71 h79.99
  text "(Mixed)" at 3328.11,-1783.71 h79.99
  text "(Mixed)" at 3842.33,-1783.71 h79.99
  text "2" at 311.82,-1949.28 h79.99
  text "62.99mil (1.600mm)" at 701.62,-1949.28 h79.99
  text "PTH" at 1467.04,-1949.28 h79.99
  text "Round" at 1797,-1949.28 h79.99
  text "Top - Bottom" at 2277.38,-1949.28 h79.99
  text "Pad" at 2934.48,-1949.28 h79.99
  text "Rounded" at 3328.11,-1949.28 h79.99
  text "c250h160" at 3842.33,-1949.28 h79.99
  text "3" at 311.82,-2114.86 h79.99
  text "28.00mil (0.711mm)" at 701.62,-2114.86 h79.99
  text "PTH" at 1467.04,-2114.86 h79.99
  text "Round" at 1797,-2114.86 h79.99
  text "Top - Bottom" at 2277.38,-2114.86 h79.99
  text "Via" at 2934.48,-2114.86 h79.99
  text "Rounded" at 3328.11,-2114.86 h79.99
  text "v127h71" at 3842.33,-2114.86 h79.99
  text "4" at 311.82,-2280.43 h79.99
  text "40.00mil (1.016mm)" at 701.62,-2280.43 h79.99
  text "PTH" at 1467.04,-2280.43 h79.99
  text "Round" at 1797,-2280.43 h79.99
  text "Top - Bottom" at 2277.38,-2280.43 h79.99
  text "Pad" at 2934.48,-2280.43 h79.99
  text "(Mixed)" at 3328.11,-2280.43 h79.99
  text "(Mixed)" at 3842.33,-2280.43 h79.99
  text "4" at 311.82,-2446.01 h79.99
  text "55.00mil (1.397mm)" at 701.62,-2446.01 h79.99
  text "PTH" at 1467.04,-2446.01 h79.99
  text "Round" at 1797,-2446.01 h79.99
  text "Top - Bottom" at 2277.38,-2446.01 h79.99
  text "Pad" at 2934.48,-2446.01 h79.99
  text "(Mixed)" at 3328.11,-2446.01 h79.99
  text "(Mixed)" at 3842.33,-2446.01 h79.99
  text "3.00mil (0.076mm)" at 4921.8,-2446.01 h79.99
  text "3.00mil (0.076mm)" at 5724.88,-2446.01 h79.99
  text "4" at 311.82,-2611.58 h79.99
  text "152.00mil (3.861mm)" at 701.62,-2611.58 h79.99
  text "PTH" at 1467.04,-2611.58 h79.99
  text "Round" at 1797,-2611.58 h79.99
  text "Top - Bottom" at 2277.38,-2611.58 h79.99
  text "Pad" at 2934.48,-2611.58 h79.99
  text "Rounded" at 3328.11,-2611.58 h79.99
  text "c724h386z508" at 3842.33,-2611.58 h79.99
  text "5" at 311.82,-2777.16 h79.99
  text "29.53mil (0.750mm)" at 701.62,-2777.16 h79.99
  text "PTH" at 1467.04,-2777.16 h79.99
  text "Round" at 1797,-2777.16 h79.99
  text "Top - Bottom" at 2277.38,-2777.16 h79.99
  text "Pad" at 2934.48,-2777.16 h79.99
  text "Rounded" at 3328.11,-2777.16 h79.99
  text "c126h75" at 3842.33,-2777.16 h79.99
  text "DRAWN:" at 10245,-2823 h90
  text "SBS" at 10545,-2833 h90
  text "DATE:" at 10815.44,-2833.51 h90
  text "06/27/2022" at 11034.58,-2833.51 h90
  text "S2Lenel" at 12320,-2870 h90
  text "6" at 311.82,-2942.73 h79.99
  text "27.56mil (0.700mm)" at 701.62,-2942.73 h79.99
  text "PTH" at 1467.04,-2942.73 h79.99
  text "Round" at 1797,-2942.73 h79.99
  text "Top - Bottom" at 2277.38,-2942.73 h79.99
  text "Pad" at 2934.48,-2942.73 h79.99
  text "Rounded" at 3328.11,-2942.73 h79.99
  text "c121h70" at 3842.33,-2942.73 h79.99
  text "CHECKED:" at 10245,-2973 h90
  text "ONE SPEEN ST." at 12330,-2980 h90
  text "DATE:" at 10815.44,-2986.12 h90
  text "FRAMINGHAM, MA 01791" at 12320,-3083 h90
  text "22" at 311.82,-3108.31 h79.99
  text "43.31mil (1.100mm)" at 701.62,-3108.31 h79.99
  text "PTH" at 1467.04,-3108.31 h79.99
  text "Round" at 1797,-3108.31 h79.99
  text "Top - Bottom" at 2277.38,-3108.31 h79.99
  text "Pad" at 2934.48,-3108.31 h79.99
  text "(Mixed)" at 3328.11,-3108.31 h79.99
  text "(Mixed)" at 3842.33,-3108.31 h79.99
  text "CHECKED:" at 10245,-3123 h90
  text "DATE:" at 10817.4,-3128.96 h90
  text "DWG TITLE" at 11522.72,-3176.92 h90
  text "UNLESS OTHERWISE SPECIFIED:" at 10200.76,-3261.72 h90
  text "26" at 311.82,-3273.88 h79.99
  text "35.04mil (0.890mm)" at 701.62,-3273.88 h79.99
  text "PTH" at 1467.04,-3273.88 h79.99
  text "Round" at 1797,-3273.88 h79.99
  text "Top - Bottom" at 2277.38,-3273.88 h79.99
  text "Pad" at 2934.48,-3273.88 h79.99
  text "(Mixed)" at 3328.11,-3273.88 h79.99
  text "(Mixed)" at 3842.33,-3273.88 h79.99
  text "M1-3200 Test Board" at 12370,-3323 h90
  text "DIMENSIONS ARE IN INCHES AND APPLY" at 10200.76,-3357.47 h90
  text "54" at 311.82,-3439.46 h79.99
  text "31.50mil (0.800mm)" at 701.62,-3439.46 h79.99
  text "PTH" at 1467.04,-3439.46 h79.99
  text "Round" at 1797,-3439.46 h79.99
  text "Top - Bottom" at 2277.38,-3439.46 h79.99
  text "Pad" at 2934.48,-3439.46 h79.99
  text "(Mixed)" at 3328.11,-3439.46 h79.99
  text "(Mixed)" at 3842.33,-3439.46 h79.99
  text "AFTER PROCESSING TOLERANCES" at 10197.95,-3453.23 h90
  text "FABRICATION DRAWING" at 12145,-3508 h90
  text "TOLERANCES" at 10281.46,-3590.18 h90
  text "186" at 311.82,-3605.03 h79.99
  text "12.00mil (0.305mm)" at 701.62,-3605.03 h79.99
  text "PTH" at 1467.04,-3605.03 h79.99
  text "Round" at 1797,-3605.03 h79.99
  text "Top - Bottom" at 2277.38,-3605.03 h79.99
  text "Via" at 2934.48,-3605.03 h79.99
  text "Rounded" at 3328.11,-3605.03 h79.99
  text "v61h30" at 3842.33,-3605.03 h79.99
  text ".XXX = +/- .005" at 10820,-3673 h90
  text "SIZE" at 11486.17,-3676.92 h90
  text "DWG NO." at 11712.72,-3676.92 h90
  text ".X   = +/- .1" at 10300.21,-3684.84 h90
  text "Rev" at 13760.17,-3685.92 h90
  text ".XX  = +/- .01" at 10300.58,-3764.3 h90
  text "B" at 13814,-3770 h90
  text "318 Total" at 311.82,-3770.61 h79.99
  text "ANGLES = +/- 2" at 10820,-3773 h90
  text "S2-PC-0000" at 12370,-3783 h90
  text "B" at 11524.18,-3820.59 h90
  text "SCALE:" at 11522.77,-3944.49 h120
  text "1/1" at 11953.87,-3949.13 h120
  text "REMOVE ALL BURRS AND SHARP EDGES" at 10190,-3950 h90
  text "NOTES" at 22872,-8722 h120
  text "NOTES" at 21796.69,-15613.25 h120

## Dimensions
3975,4996 to 3975,-4 on Drill Drawing
-2,4996 to 3975,4996 on Drill Drawing

## Text inside footprints (layer, text, board x,y; h text height)
J4: Silkscreen Top "1" at 241.93,3327.15 h40 r270; Silkscreen Top "6" at 241.93,2837.38 h40 r270
J10: Silkscreen Top "1" at 3470,4545 h60; Top Assembly "1" at 3490,4665 h40
J11: Silkscreen Top "1" at 2705,4534.52 h60; Top Assembly "1" at 2730,4665 h40
U1: Silkscreen Top "*" at 674.75,674 h60 r180
U5: Silkscreen Top "*" at 2966.95,3647.5 h50 r270
U6: Silkscreen Top "*" at 2766.43,2692.5 h50 r90
U12: Silkscreen Top "*" at 2956.5,1028.57 h50